# Altium PCB PCB1.PcbDoc
Units mm, origin at the board's own origin, x right, y up, seen from the top; angles counter-clockwise.
Board outline 202.97 x 55.7 mm, 4 copper layers (Top Layer, Mid-Layer 1, Mid-Layer 2, Bottom Layer), stack 0.238 mm thick; 28 components, 17 nets, 118 pads, 628 vias.
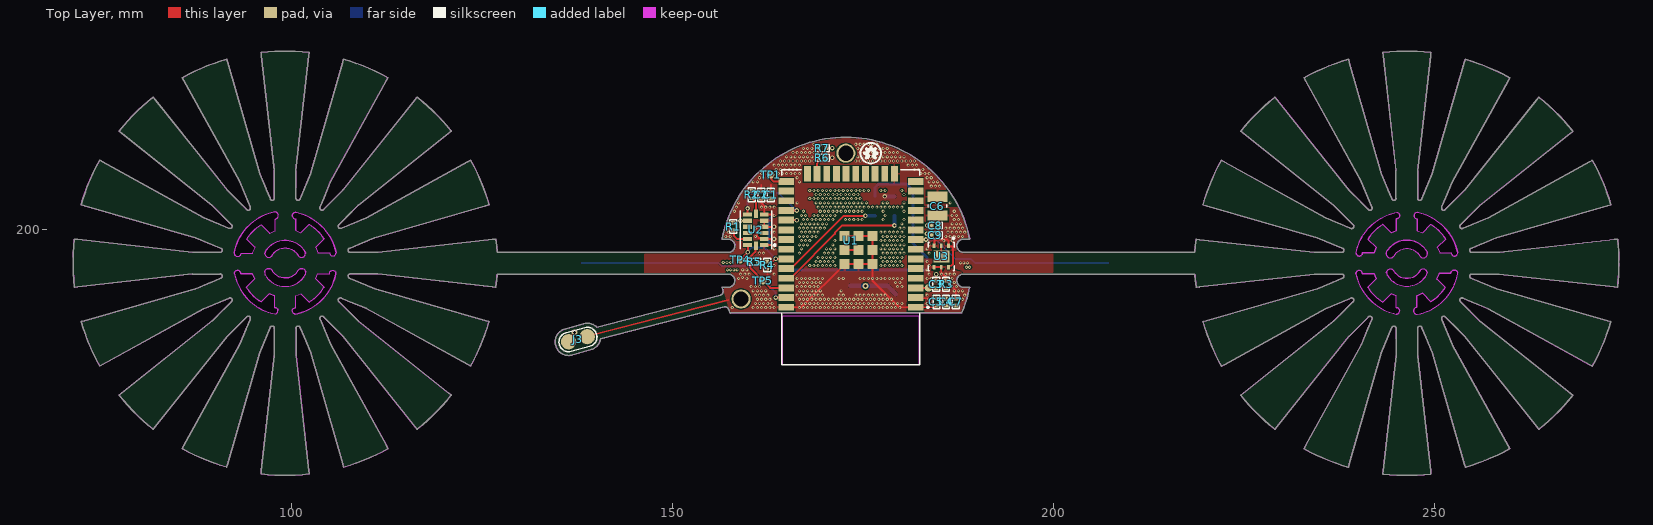
[diagram p0: Top Layer view]
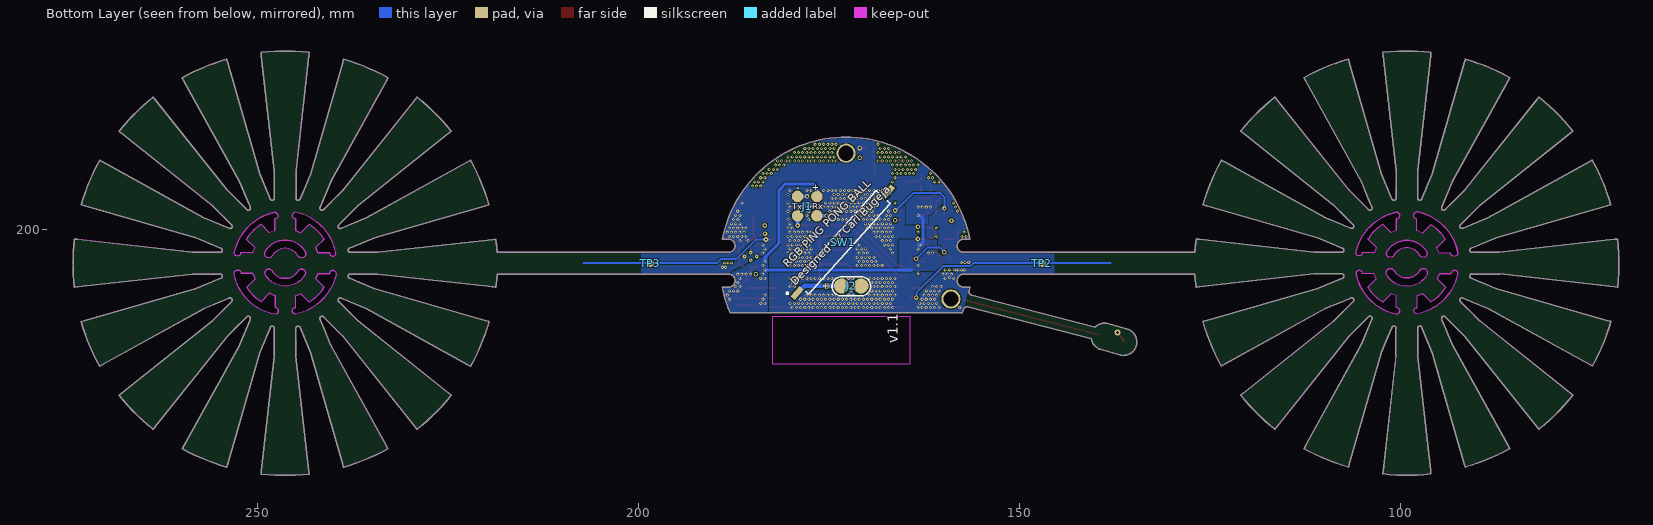
[diagram p1: Bottom Layer view, seen from below]
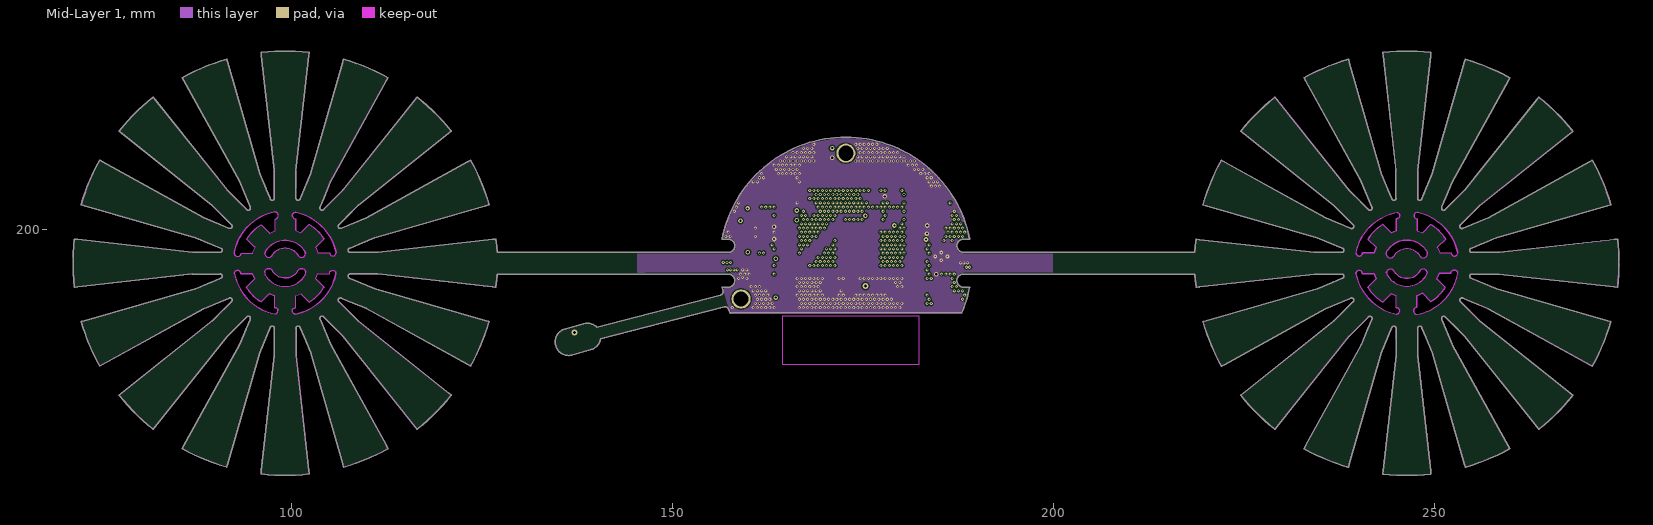
[diagram p2: Mid-Layer 1]
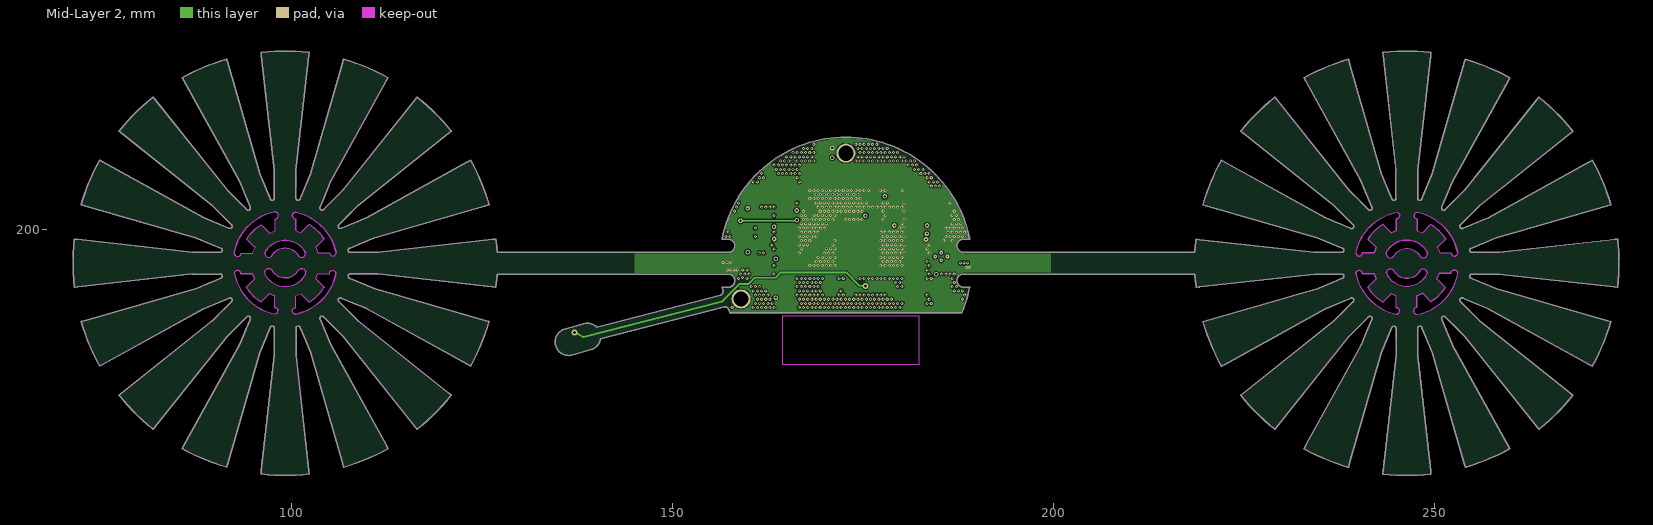
[diagram p3: Mid-Layer 2]

## Layer stack, top to bottom
Top Solder: solder mask 0.0102, Solder Resist, Dk 3.5
Top Layer: signal copper 0.0356
Dielectric 1: dielectric 0.032, FR-4, Dk 4.8
Mid-Layer 1: signal copper 0.0356
Dielectric2: dielectric 0.032, FR-4, Dk 4.8
Mid-Layer 2: signal copper 0.0356
Dielectric3: dielectric 0.032, FR-4, Dk 4.8
Bottom Layer: signal copper 0.0356
Bottom Solder: solder mask 0.0102, Solder Resist, Dk 3.5

## Board outline
838 vertices, not listed, extent 71.3,167.729 274.271,223.431
cut-out: 249.585,200.673 cw(c246.42,195.575) 251.518,198.74 251.535,198.751 250.425,197.643 250.714,196.945 252.271,196.944 252.256,196.944 ccw(c252.677,196.944) 253.098,196.929 ccw(c246.435,195.575) 247.784,202.24 ccw(c247.784,201.819) 247.769,201.398 247.792,201.398 247.79,199.869 248.488,199.58
cut-out: 253.136,194.212 ccw(c252.664,194.212) 252.194,194.255 250.714,194.256 ccw(c250.714,194.206) 250.668,194.225 250.379,193.527 ccw(c250.425,193.508) 250.375,193.508 ccw(c250.425,193.508) 250.39,193.472 251.455,192.405 cw(c246.421,195.575) 249.589,190.539 248.524,191.606 ccw(c248.488,191.571) 248.468,191.617 247.771,191.328 ccw(c247.79,191.282) 247.74,191.282 247.739,189.788 ccw(c247.789,189.318) 247.317,189.318 ccw(c247.789,189.318) 247.773,188.847 247.785,188.848 ccw(c246.42,195.561) 253.135,194.202 ccw(c253.085,194.212)
cut-out: 243.791,197.122 ccw(c244.261,196.836) 244.261,196.285 ccw(c244.261,196.836) 244.742,196.567 ccw(c244.731,196.573) 244.742,196.567 ccw(c244.991,196.419) 244.741,196.566 244.742,196.567 cw(c246.42,195.575) 248.113,196.542 ccw(c248.157,196.567) 248.118,196.535 ccw(c248.579,196.836) 248.579,196.285 ccw(c248.579,196.836) 249.046,197.127 ccw(c246.42,195.575)
cut-out: 244.683,194.583 ccw(c244.261,194.315) 243.855,194.023 243.829,194.062 ccw(c246.42,195.575) 249.006,194.054 ccw(c248.579,194.315) 248.142,194.558 248.156,194.581 cw(c246.42,195.575)
cut-out: 245.051,191.282 244.353,191.571 243.252,190.471 243.256,190.478 cw(c246.42,195.575) 241.323,192.41 241.306,192.4 242.416,193.508 242.127,194.206 240.57,194.207 240.585,194.207 ccw(c240.164,194.207) 239.743,194.221 ccw(c246.406,195.575) 245.057,188.91 ccw(c245.057,189.332) 245.072,189.753 245.049,189.753
cut-out: 245.066,202.253 cw(c245.052,201.832) 245.052,201.411 245.052,201.425 245.05,199.869 244.353,199.58 243.244,200.69 243.255,200.672 ccw(c246.42,195.575) 241.323,198.74 241.316,198.744 242.415,197.643 242.126,196.945 240.598,196.946 240.598,196.924 cw(c240.177,196.938) 239.755,196.938 cw(c246.42,195.589)
cut-out: 100.501,188.907 cw(c100.515,189.328) 100.515,189.749 100.515,189.735 100.517,191.291 101.214,191.58 102.323,190.47 102.312,190.487 ccw(c99.147,195.585) 104.244,192.42 104.251,192.416 103.152,193.517 103.441,194.215 104.969,194.214 104.969,194.236 cw(c105.39,194.222) 105.812,194.222 cw(c99.147,195.571)
cut-out: 100.516,199.878 101.214,199.589 102.315,200.689 102.311,200.682 cw(c99.147,195.585) 104.244,198.749 104.261,198.76 103.151,197.652 103.44,196.954 104.997,196.953 104.982,196.953 ccw(c105.403,196.953) 105.824,196.939 ccw(c99.161,195.585) 100.51,202.249 ccw(c100.51,201.828) 100.495,201.407 100.518,201.407
cut-out: 100.884,196.577 ccw(c101.306,196.845) 101.712,197.137 101.738,197.097 ccw(c99.147,195.585) 96.561,197.106 ccw(c96.988,196.845) 97.425,196.602 97.411,196.579 cw(c99.147,195.585)
cut-out: 101.776,194.038 ccw(c101.306,194.324) 101.306,194.875 ccw(c101.306,194.324) 100.825,194.593 ccw(c100.836,194.587) 100.825,194.592 100.825,194.593 ccw(c100.576,194.741) 100.826,194.593 100.825,194.593 cw(c99.147,195.585) 97.454,194.618 ccw(c97.41,194.592) 97.449,194.625 ccw(c96.988,194.324) 96.988,194.875 ccw(c96.988,194.324) 96.521,194.033 ccw(c99.147,195.585)
cut-out: 92.431,196.948 ccw(c92.903,196.948) 93.373,196.905 94.853,196.904 ccw(c94.853,196.954) 94.899,196.935 95.188,197.633 ccw(c95.142,197.652) 95.192,197.652 ccw(c95.142,197.652) 95.177,197.688 94.112,198.755 cw(c99.146,195.585) 95.978,200.62 97.043,199.554 ccw(c97.079,199.589) 97.099,199.543 97.796,199.832 ccw(c97.777,199.878) 97.827,199.878 97.828,201.372 ccw(c97.778,201.841) 98.25,201.841 ccw(c97.778,201.841) 97.794,202.313 97.782,202.312 ccw(c99.147,195.599) 92.432,196.958 ccw(c92.482,196.948)
cut-out: 95.982,190.487 cw(c99.147,195.585) 94.049,192.42 94.032,192.409 95.142,193.517 94.853,194.215 93.296,194.216 93.311,194.216 ccw(c92.89,194.216) 92.469,194.23 ccw(c99.132,195.585) 97.783,188.92 ccw(c97.783,189.341) 97.798,189.762 97.775,189.762 97.777,191.291 97.079,191.58
board region "Layer Stack Region 1": 572 vertices, not listed, extent 71.296,167.734 126.96,223.435
board region "Layer Stack Region 1": 187.983,194.121 187.878,194.093 187.683,193.98 187.523,193.82 187.41,193.624 187.352,193.406 187.352,193.18 187.41,192.962 187.523,192.766 187.683,192.606 187.878,192.493 188.097,192.435 188.21,192.428 188.966,192.428 188.985,192.42 188.999,192.406 189.007,192.387 189.006,192.366 188.999,192.35 188.915,191.929 188.704,191.096 188.45,190.276 188.154,189.47 187.982,189.068 187.96,189.049 187.939,189.044 157.615,189.038 157.593,189.036 157.572,189.042 157.552,189.067 157.528,189.121 157.483,189.23 157.438,189.339 157.394,189.448 157.37,189.511 157.342,189.593 157.241,189.736 157.094,189.829 156.923,189.859 156.836,189.849 140.56,185.651 140.541,185.533 140.472,185.304 140.373,185.086 140.245,184.883 140.091,184.7 139.914,184.539 139.717,184.403 139.503,184.294 139.387,184.254 136.701,183.493 136.53,183.46 136.181,183.462 135.839,183.532 135.517,183.667 135.228,183.863 134.983,184.111 134.791,184.402 134.659,184.725 134.592,185.068 134.594,185.417 134.663,185.758 134.798,186.08 134.993,186.37 135.241,186.615 135.532,186.808 135.855,186.941 136.026,186.974 138.558,187.686 138.76,187.715 139.168,187.68 139.558,187.552 139.907,187.338 140.053,187.195 156.28,191.38 156.354,191.406 156.485,191.493 156.581,191.617 156.631,191.766 156.639,191.855 156.638,191.869 156.624,191.928 156.598,192.045 156.573,192.163 156.548,192.282 156.528,192.352 156.526,192.381 156.539,192.406 156.563,192.42 156.578,192.42 157.324,192.42 157.409,192.424 157.576,192.458 157.732,192.522 157.873,192.617 157.993,192.737 158.088,192.878 158.153,193.034 158.186,193.201 158.19,193.286 158.186,193.371 158.153,193.537 158.088,193.694 157.993,193.835 157.873,193.955 157.732,194.049 157.576,194.114 157.427,194.143 157.486,197.021 157.575,197.039 157.732,197.104 157.873,197.198 157.993,197.318 158.087,197.459 158.152,197.616 158.185,197.782 158.189,197.867 158.185,197.952 158.152,198.118 158.087,198.275 157.993,198.416 157.873,198.536 157.732,198.63 157.575,198.695 157.409,198.728 157.324,198.732 156.616,198.732 156.605,198.719 156.571,198.712 156.54,198.726 156.524,198.757 156.527,198.778 156.528,198.797 156.535,198.81 156.646,199.368 156.944,200.466 157.317,201.541 157.762,202.588 158.279,203.601 158.864,204.577 159.515,205.511 160.228,206.397 161,207.233 161.828,208.013 162.707,208.735 163.634,209.394 164.605,209.989 165.613,210.515 166.656,210.971 167.727,211.355 168.822,211.663 169.936,211.896 171.063,212.052 172.198,212.13 172.767,212.13 173.335,212.13 174.47,212.052 175.597,211.897 176.71,211.664 177.804,211.355 178.875,210.972 179.917,210.517 180.926,209.991 181.896,209.397 182.822,208.737 183.702,208.016 184.53,207.236 185.302,206.402 186.015,205.516 186.666,204.583 187.251,203.608 187.768,202.595 188.214,201.548 188.587,200.474 188.886,199.377 189.003,198.809 189.006,198.794 189.006,198.78 188.999,198.761 188.984,198.747 188.956,198.74 188.209,198.74 188.096,198.732 187.878,198.674 187.682,198.561 187.522,198.401 187.409,198.205 187.351,197.987 187.351,197.761 187.409,197.543 187.522,197.347 187.682,197.188 187.878,197.075 187.987,197.045
board region "Layer Stack Region 1": 588 vertices, not listed, extent 187.983,167.725 274.271,223.426
board region "Layer Stack Region 1": 127.381,194.156 126.961,194.156 126.96,194.136 126.96,197.018 126.961,197.006 127.381,197.006
board region "Layer Stack Region 1": 127.381,197.006 146.522,197.006 146.536,197.001 157.324,197.001 157.409,197.006 157.486,197.021 157.427,194.143 157.409,194.147 157.324,194.151 146.316,194.152 146.303,194.156 127.381,194.156

## Design rules (kind name [scope] priority, off if disabled: settings)
Clearance [All] p1: gap=0.15 ignorepadtopadclearanceinfootprint=FALSE
HoleToHoleClearance [All] p1: gap=0.1 allowstackedmicrovias=TRUE
PasteMaskExpansion [All] p1: expansion=-0.05
PolygonConnect PolygonConnect_1 [IsVia] p1: connectstyle=Direct reliefconductorwidth=0.254 reliefentries=4 polygonreliefangle="90 Angle" airgapwidth=0.254
PolygonConnect [All] p2: connectstyle=Relief reliefconductorwidth=0.254 reliefentries=4 polygonreliefangle="90 Angle" airgapwidth=0.254
RoutingVias [All] p1: holewidth=0.711 width=1.27 viastyle="Through Hole" minholewidth=0.2 minwidth=0.4 maxholewidth=0.711 maxwidth=1.27
SolderMaskExpansion [All] p1: expansion=0 istentingtop=FALSE
Width [All] p1: maxlimit=1 minlimit=0.254 preferedwidth=0.254
28 further rules are at their usual default settings.

## Components (designator, comment, footprint, x,y, rotation, side; value= is the part's Value field where it differs from the comment)
C1 "100nF" RESC1005X03N 162.915,204.553 r90 top
C2 "10nF" RESC1005X03N 161.655,204.545 r90 top
C3 "1uF" RESC1005X03N 184.637,192.816 r90 top
C4 "100nF" RESC1005X03N 185.923,190.489 r270 top
C5 "10nF" RESC1005X03N 184.662,190.5 r270 top
C6 "47uF" TAYO-C1210-2_L 184.785,203.073 r270 top
C7 "4.7uF" RESC1005X03N 187.193,190.489 r270 top
C8 "100nF" RESC1005X03N 184.493,200.529 r180 top
C9 "10nF" RESC1005X03N 184.493,199.263 r180 top
J1 "H5P2.54" 4PAD 177.873,203.073 r90 bottom
J2 "H2P2.54" T2P2.54 172.085,192.592 r0 bottom
J3 "H2P2.54" T2P2.54 137.582,185.602 r195 top
R1 "5k" RESC1005X03N 157.988,200.395 r270 top
R2 "5k" RESC1005X03N 160.387,204.571 r270 top
R3 "10k" RESC1005X03N 185.923,192.816 r90 top
R4 "5k" RESC1005X03N 162.429,195.326 r90 top
R5 "5k" RESC1005X03N 160.719,195.772 r0 top
R6 "10k" RESC1005X03N 169.672,209.423 r180 top
R7 "10k" RESC1005X03N 169.672,210.693 r180 top
SW1 "MK15-B-2-OE" CAPMP16025X38N 174.012,197.459 r132 bottom
TP1 "TESTPAD" TESTPAD#1 162.875,207.199 r90 top
TP2 "TESTPAD" TESTPAD#1 147.066,195.58 r90 bottom
TP3 "TESTPAD" TESTPAD#2 198.501,195.58 r90 top
TP4 "TESTPAD" TESTPAD#1 158.88,196.051 r90 top
TP5 "TESTPAD" TESTPAD#1 161.872,193.283 r90 top
U1 "ESP32-WROOM-32" FP-ESP32-WROOM-32-MFG 173.428,195.061 r180 top
U2 "ADXL345BCCZ-RL7" FP-CC-14-1-MFG 160.954,199.962 r180 top
U3 "ESP32-WROOM-32" NGG0006A_V 185.293,196.469 r270 top

## Footprints (in the part's own frame and the unit in brackets; to place one, negate y for a bottom-side part, rotate by r counter-clockwise, add the part's x,y. Pads: shape width x height; smd on the part's side, far side on the other; paste and mask are expansions set on the pad)
4PAD [mil]
  round 60 smd: 1(-50,50) 2(-50,-50) 3(50,50) 4(50,-50)
CAPMP16025X38N [mm] "Molded Capacitor, 2-Leads, Body 16.00x2.50mm, IPC Medium Density"
  rect 1.8x0.75 smd: 1(-7.775,0) 2(10.125,0)
  silkscreen extent -8.77,-1.23 9.14,1.27, body extent -6.86,-1.23 9.14,1.27, height 3.75
FP-CC-14-1-MFG [mm]
  rect 1.145x0.55 smd paste+0 mask+0: 1(-1.098,2) 2(-1.098,1.2) 3(-1.098,0.4) 4(-1.098,-0.4) 5(-1.098,-1.2) 6(-1.098,-2) 8(1.098,-2) 9(1.098,-1.2) 10(1.098,-0.4) 11(1.098,0.4) 12(1.098,1.2) 13(1.098,2)
  rect 0.55x1.145 smd paste+0 mask+0: 7(0,-2.097) 14(0,2.097)
  silkscreen extent -2.6,-2.5 2.07,2.5, body extent -2.17,-3.17 2.17,3.17, height 0.25
FP-ESP32-WROOM-32-MFG [mm]
  rect 2x0.9 smd paste+0 mask+0: 1(-8.5,5.26) 2(-8.5,3.99) 3(-8.5,2.72) 4(-8.5,1.45) 5(-8.5,0.18) 6(-8.5,-1.09) 7(-8.5,-2.36) 8(-8.5,-3.63) 9(-8.5,-4.9) 10(-8.5,-6.17) 11(-8.5,-7.44) 12(-8.5,-8.71) 13(-8.5,-9.98) 14(-8.5,-11.25) 25(8.5,-11.25) 26(8.5,-9.98) 27(8.5,-8.71) 28(8.5,-7.44) 29(8.5,-6.17) 30(8.5,-4.9) 31(8.5,-3.63) 32(8.5,-2.36) 33(8.5,-1.09) 34(8.5,0.18) 35(8.5,1.45) 36(8.5,2.72) 37(8.5,3.99) 38(8.5,5.26)
  rect 0.9x2 smd paste+0 mask+0: 15(-5.715,-12.25) 16(-4.445,-12.25) 17(-3.175,-12.25) 18(-1.905,-12.25) 19(-0.635,-12.25) 20(0.635,-12.25) 21(1.905,-12.25) 22(3.175,-12.25) 23(4.445,-12.25) 24(5.715,-12.25)
  rect 1.33x1.33 smd paste+0 mask+0: 39(-2.835,-0.405) 39(-2.835,-4.075) 39(-2.835,-2.24) 39(-1,-0.405) 39(-1,-2.24) 39(-1,-4.075) 39(0.835,-0.405) 39(0.835,-2.24) 39(0.835,-4.075)
  Keep-Out Layer region: -9,6.45 9,6.45 9,12.75 -9,12.75
  Keep-Out Layer region: -9,6.45 9,6.45 9,12.75 -9,12.75
  silkscreen extent -10.25,-12.8 9.05,12.8, body extent -9.6,-13.35 9.6,12.9, height 0.25
NGG0006A_V [mm] "SON, 6-Leads, Body 3x3 mm, Pitch 0.95mm, Full Paste, NSC Recommended"
  rrect29% 0.6x0.35 smd paste-0.175 mask+0.051: 1(-1.4,0.95) 2(-1.4,0) 3(-1.4,-0.95) 4(1.4,-0.95) 5(1.4,0) 6(1.4,0.95)
  rrect6% 1.6x2.1 smd paste-0.8 mask+0.051: 7(0,0)
  silkscreen extent -2.52,-1.7 1.85,1.73, body extent -1.55,-1.55 1.55,1.55, height 0.8
RESC1005X03N [mm] "Chip Resistor, 2-Leads, Body 1.00x0.50mm, IPC Medium Density"
  rect 0.5x0.55 smd: 1(-0.475,0) 2(0.475,0)
  silkscreen extent -0.9,-0.45 0.9,0.45, body extent -0.5,-0.25 0.5,0.25, height 0.3
T2P2.54 [mm]
  round 2 smd: 1(-1.27,0) 2(1.27,0)
  silkscreen extent -2.54,-1.23 2.54,1.31
TAYO-C1210-2_L [mm] "Chip Capacitor, 2-Leads, Body 3.50x2.70mm, IPC High Density"
  rect 1.35x2.6 smd: 1(-1.225,0) 2(1.225,0)
  silkscreen extent -0.15,-1.2 0.15,1.2, body extent -1.75,-1.35 1.75,1.35, height 2.7
TESTPAD#1 [mm]
  round 1 smd paste-5: 1(0,0)
TESTPAD#2 [mm]
  round 1 smd far side paste-5: 1(0,0)

## Part data
C1 C2 C3 C4 C5 C7 C8 C9: library part CAP
C6: library part CMP-2000-06559-1, "High Value Multilayer Ceramic Capacitor, 47 uF, 10 V, +/- 20%, -55 to 125 degC, 2-Pin - LMK325B7476KM-PRSMD (C1210), RoHS, Tape and Reel", Capacitance=47µF, Manufacturer="Taiyo Yuden", Operating Temperature=-55°C~125°C, Package / Case=1210(3225Metric), Package Description="2-Pin Surface Mount Device, Body 3.2 x 2.5 mm, Height 2.7 mm", Package Reference=C1210, Ratings=-, Standard Package=1, Temperature Coefficient=X7R, Tolerance=±20%, Voltage - Rated=10V, Applications=GeneralPurpose, Category=Capacitors, Datasheet URL=https://datasheet.ciiva.com/142/lmk325b7476mm-tr-ss-142765.pdf, Datasheet Version=10/2014, Family=CeramicCapacitors, Features=-, Height - Seated (Max)=-, Lead Spacing=-, Lead Style=-, Manufacturer URL=http://www.t-yuden.com/, Mounting Technology=SurfaceMount, Mounting Type=SurfaceMount,MLCC, Online Catalog=MSeries, Other Names=587-2783-6, Packaging=Digi-Reel®, Series=M, Size / Dimension="0.126\"Lx0.098\"W(3.20mmx2.50mm)", Thickness (Max)="0.106\"(2.70mm)"
J1: library part H4P2.54
R1 R2 R3 R4 R5 R6 R7: library part RES
U1: library part CMP-194065-000008-1, "RX TXRX MOD WIFI SURFACE MOUNT", Case/Package=SMD/SMT, Frequency=2.5GHz, Max Operating Temperature=85°C, Min Operating Temperature=-40°C, Operating Supply Voltage=3.6V, Package Quantity=550, Data Rate=150Mbps, Mount="Surface Mount", Packaging="Cut Tape", Sensitivity=-98dBm, Weight=0.088185oz
U2: library part CMP-0885-00033-2, "ACCEL 2-16G I2C/SPI 14LGA", Case/Package=LGA, Max Operating Temperature=85°C, Max Supply Voltage=3.6V, Min Operating Temperature=-40°C, Min Supply Voltage=2V, Nominal Supply Current=140uA, Operating Supply Current=145uA, Package Quantity=1, -3db Bandwidth=1.6kHz, Axis="X, Y, Z", Bandwidth=0.05Hz, Depth=3mm, Lead Free="Contains Lead", Length=5mm, Number of Pins=14, Output Type=Digital, Packaging="Tape and Reel", Radiation Hardening=No, Sensitivity=256LSB/g
U3: library part CMP-0062-01530-4, "500mA Low Dropout CMOS Linear Regulators Stable with Ceramic Output Capacitors, 6-pin LLP, Pb-Free, 1000 Reel", Manufacturer="Texas Instruments", PackageTopMarking=ZXYTT*L130B, PartNumber=LP38693SD-3.3/NOPB, PowerWise=Y, ComponentLink1Description="Datasheet URL", ComponentLink1URL=http://www.ti.com/general/docs/lit/getliterature.tsp?genericPartNumber=LP38693&fileType=pdf, CompType="LDO IC", High-Reliability=Y, PackageDescription="LLP, Plastic, Dual, 3 x 3 x 0.8mm Body, 6 Lead, 0.95mm Pitch, No Pullback", PackageReference=NGG0006A, PinCount=6, RoHS=Y

## Free pads (board coordinates)
  round 1 smd paste-2: 4(183.623,192.341)
  round 2.5 hole 2: ""(159.004,190.881) ""(172.767,210.026)

## Via types
v1: diameter 0.4, hole 0.2, Top Layer to Bottom Layer, tented both sides, 604 vias
v2: diameter 0.6, hole 0.3, Top Layer to Bottom Layer, tented both sides, 18 vias
v3: diameter 0.5, hole 0.2, Top Layer to Bottom Layer, tented bottom, 4 vias
v4: diameter 0.8, hole 0.4, Top Layer to Bottom Layer, tented both sides, 2 vias

## Nets (pads, with @x,y where several pads share a name; then routed paths per layer and width w, separated by ;. In a path a pad name is that pad's centre, name@x,y a point inside that pad or via, vN(x,y) a via of type N, cw(c..) or ccw(c..) an arc to the next point about the centre after c; other vN are vias at no path point)
+3.3V: C1.1 C2.1 C4.1 C5.1 C7.1 J1.4 R2.1 R3.2 R4.1 R5.2 U1.2 U2.1 U2.6 U3.4 U3.5 | length 59.2
  Top Layer w0.254: R2.1 160.51,204.923 160.778,204.923 161.63,204.07 C2.1 161.655,203.497 162.052,203.1 U2.6 ; C2.1@161.68,204.07 C1.1@163.026,204.07 ; U2.1@161.929,197.84 U2.1 ; R4.1@162.429,194.876 R4.1@162.445,194.861 ; U2.1@162.429,197.962 v1@163.262,197.962 ; U2.6@162.429,201.962 v1@163.262,201.962 ; 162.445,194.123 162.46,194.108 ; U1.2 182.024,190.975 C5.1 C4.1@186.055,190.975 ; U3.4 U3.5 185.293,194.326 185.847,193.771 185.847,193.367 R3.2 185.948,193.291 187.193,192.046 C7.1 C4.1
  Bottom Layer w0.4: v1@163.262,197.962 163.224,198 162.981,198 162.685,198.296 162.685,201.385 v1@163.262,201.962 ; 164.094,194.701 183.423,194.701 v1(183.425,194.7) ; J1.4 176.603,205.53 177.067,205.994 180.721,205.994 181.61,205.105 181.61,198.179 183.425,196.365 v1(183.425,195.8)
  other v1: 183.425,190.3 183.975,190.3 183.7,190.85 188.1,190.85 183.425,191.4 188.375,191.4 187,191.95 187.55,191.95 188.1,191.95 186.725,192.5 187.275,192.5 187,193.05 183.425,193.6 183.975,193.6 186.725,193.6 163.35,194.15 183.7,194.15 185.35,194.15 185.9,194.15 186.45,194.15 187,194.15 163.35,195.25 183.7,195.25 161.425,196.9 161.975,196.9 163.35,197.45 163.075,198 163.35,201.85 161.7,202.95 162.25,202.95 162.8,202.95 163.35,202.95
GND: C1.2 C2.2 C3.2 C4.2 C5.2 C6.1 C7.2 C8.2 C9.2 J1.3 J2.1 J3.1 R1.1 R6.1 U1.1 U1.15 U1.38 U1.39 U2.2 U2.4 U2.5 U3.2 U3.7 | length 70.2
  Top Layer w0.254: J3.1@139.556,186.189 157.32,190.77 ; C2.2@161.655,204.995 C2.2 161.655,205.828 ; U2.2 161.908,198.906 161.322,198.906 161.098,199.129 161.098,199.995 161.322,200.218 161.908,200.218 U2.4 U2.5 ; U2.2@162.429,198.762 v2(163.335,198.762) ; U2.4@162.429,200.362 v2(163.335,200.362) ; C1.2 162.915,205.861 ; U1.38 166.928,189.801 172.593,195.466 174.428,195.466 U1.39@176.263,195.466 ; R6.1@170.172,209.423 v2(170.979,209.423) ; U1.39@174.428,197.301 172.593,197.301 172.593,199.136 174.428,199.136 176.263,199.136 176.263,197.301 U1.39@176.263,195.466 ; v2(183.408,199.468) 183.813,199.468 C9.2 ; v2(183.436,200.529) C8.2 ; C3.2 v2(184.637,194.123) ; v3(185.293,196.969) U3.2 ; C4.2 C7.2 ; C4.2@186.055,190.025 C5.2 184.637,190.025 184.413,189.801 U1.1 179.769,189.801 179.148,190.422 176.263,193.307 U1.39@176.263,195.466
  Bottom Layer w0.5: v2(177.873,204.343) J1.3
  other v1: 157.85,189.75 160.6,189.75 161.15,189.75 161.7,189.75 162.25,189.75 162.8,189.75 163.35,189.75 166.65,189.75 167.2,189.75 167.75,189.75 168.3,189.75 168.85,189.75 169.4,189.75 169.95,189.75 170.5,189.75 171.05,189.75 171.6,189.75 172.15,189.75 172.7,189.75 173.25,189.75 173.8,189.75 174.35,189.75 174.9,189.75 175.45,189.75 176,189.75 176.55,189.75 177.1,189.75 177.65,189.75 178.2,189.75 178.75,189.75 179.3,189.75 179.85,189.75 160.875,190.3 161.425,190.3 161.975,190.3 162.525,190.3 163.075,190.3 166.925,190.3 167.475,190.3 168.025,190.3 168.575,190.3 169.125,190.3 169.675,190.3 170.225,190.3 170.775,190.3 171.325,190.3 171.875,190.3 172.425,190.3 172.975,190.3 173.525,190.3 174.075,190.3 174.625,190.3 175.175,190.3 175.725,190.3 176.275,190.3 176.825,190.3 177.375,190.3 177.925,190.3 178.475,190.3 179.025,190.3 179.575,190.3 180.125,190.3 161.15,190.85 161.7,190.85 162.25,190.85 162.8,190.85 166.65,190.85 167.2,190.85 167.75,190.85 168.3,190.85 168.85,190.85 169.4,190.85 169.95,190.85 170.5,190.85 171.05,190.85 171.6,190.85 172.15,190.85 172.7,190.85 173.25,190.85 173.8,190.85 174.35,190.85 174.9,190.85 175.45,190.85 176,190.85 176.55,190.85 177.1,190.85 177.65,190.85 178.2,190.85 178.75,190.85 160.875,191.4 161.425,191.4 161.975,191.4 162.525,191.4 166.375,191.4 166.925,191.4 167.475,191.4 168.025,191.4 168.575,191.4 169.125,191.4 169.675,191.4 171.875,191.4 172.425,191.4 174.075,191.4 174.625,191.4 175.175,191.4 175.725,191.4 176.275,191.4 176.825,191.4 177.375,191.4 177.925,191.4 160.6,191.95 161.15,191.95 161.7,191.95 162.25,191.95 166.65,191.95 167.2,191.95 167.75,191.95 168.3,191.95 168.85,191.95 169.4,191.95 172.15,191.95 160.325,192.5 160.875,192.5 161.425,192.5 166.375,192.5 166.925,192.5 167.475,192.5 168.025,192.5 168.575,192.5 169.125,192.5 179.575,192.5 180.125,192.5 166.65,193.05 167.2,193.05 167.75,193.05 168.3,193.05 168.85,193.05 169.4,193.05 179.3,193.05 179.85,193.05 158.675,193.6 159.775,193.6 166.375,193.6 166.925,193.6 167.475,193.6 168.025,193.6 168.575,193.6 169.125,193.6 169.675,193.6 171.875,193.6 172.425,193.6 174.625,193.6 175.175,193.6 175.725,193.6 176.275,193.6 176.825,193.6 177.375,193.6 177.925,193.6 178.475,193.6 179.025,193.6 179.575,193.6 180.125,193.6 159.171,193.716 158.95,194.15 159.5,194.15 160.05,194.15 159.225,194.7 159.775,194.7 187.825,195.627 188.273,195.627 188.709,195.627 157.025,199.1 157.575,199.1 160.875,199.1 157.3,199.65 163.35,199.65 160.875,200.2 158.125,202.4 158.4,202.95 158.675,203.5 166.375,203.5 183.975,205.7 184.525,205.7 185.075,205.7 160.6,206.25 161.15,206.25 166.65,206.25 183.7,206.25 184.25,206.25 184.8,206.25 161.425,206.8 161.975,206.8 166.375,206.8 183.425,206.8 183.975,206.8 161.7,207.35 163.9,207.35 164.45,207.35 165,207.35 165.55,207.35 166.1,207.35 166.65,207.35 182.6,207.35 183.15,207.35 183.7,207.35 163.625,207.9 164.175,207.9 164.725,207.9 165.275,207.9 165.825,207.9 166.375,207.9 181.775,207.9 182.325,207.9 182.875,207.9 163.35,208.45 163.9,208.45 164.45,208.45 165,208.45 165.55,208.45 166.1,208.45 166.65,208.45 180.95,208.45 181.5,208.45 182.05,208.45 164.175,209 164.725,209 165.275,209 165.825,209 166.375,209 166.925,209 167.475,209 168.025,209 168.575,209 174.075,209 174.625,209 175.175,209 175.725,209 176.275,209 176.825,209 177.375,209 177.925,209 178.475,209 179.025,209 179.575,209 180.125,209 180.675,209 181.225,209 181.775,209 165,209.55 165.55,209.55 166.1,209.55 166.65,209.55 167.2,209.55 167.75,209.55 168.3,209.55 174.35,209.55 174.9,209.55 175.45,209.55 176,209.55 176.55,209.55 177.1,209.55 177.65,209.55 178.2,209.55 178.75,209.55 179.3,209.55 179.85,209.55 180.4,209.55 165.825,210.1 166.375,210.1 166.925,210.1 167.475,210.1 168.025,210.1 168.575,210.1 174.625,210.1 175.175,210.1 175.725,210.1 176.275,210.1 176.825,210.1 177.375,210.1 177.925,210.1 178.475,210.1 179.025,210.1 179.575,210.1 167.2,210.65 167.75,210.65 168.3,210.65 174.35,210.65 174.9,210.65 175.45,210.65 176,210.65 176.55,210.65 177.1,210.65 177.65,210.65 178.2,210.65 168.575,211.2 174.075,211.2 174.625,211.2 175.175,211.2 175.725,211.2 176.275,211.2 176.825,211.2
  other v3: 185.293,195.969 184.493,196.469 186.093,196.469
NetC3_1: C3.1 pad.4 R3.1 U1.3 | length 4
  Top Layer w0.254: U1.3 C3.1 R3.1
NetJ1_1: J1.1 U1.35 | length 18.4
  Top Layer w0.254: U1.35 165.251,193.934 165.828,193.934 171.323,199.429 171.323,199.588 172.268,200.533 v2(179.143,200.533)
  Bottom Layer w0.5: v2(179.143,200.533) J1.1
NetJ1_2: J1.2 U1.34 | length 14.5
  Top Layer w0.254: U1.34 165.251,195.204 165.885,195.204 172.484,201.803 v2(175.333,201.803)
  Bottom Layer w0.5: v2(175.333,201.803) J1.2
NetR1_2: R1.2 U2.12 | length 2.7
  Top Layer w0.254: R1.2 158.1,199.808 158.1,199.129 158.468,198.762 U2.12
NetR2_2: R2.2 U2.7 | length 2.3
  Top Layer w0.254: R2.2 160.51,203.973 160.541,203.973 160.954,203.559 U2.7
NetR4_2: R4.2 TP4.1 U1.33 U2.13 | length 9.1
  Top Layer w0.254: TP4.1 158.91,196.051 159.86,197.001 v2(159.89,197.001) 159.89,197.929 U2.13 ; R4.2 163.127,195.801 163.477,196.151 v2(163.571,196.151) U1.33@164.403,196.151
  Bottom Layer w0.254: v2(159.89,197.001) 159.89,197.095 160.222,197.427 160.222,197.452 160.402,197.632 162.09,197.632 v2(163.571,196.151)
NetR5_1: R5.1 TP5.1 U1.36 U2.14 | length 8.5
  Top Layer w0.254: U2.14 160.878,197.788 160.878,197.062 160.244,196.428 R5.1 160.244,194.911 TP5.1 162.814,192.341 U1.36@164.403,192.341
NetR6_2: R6.2 R7.2 U1.23 | length 3.5
  Top Layer w0.254: U1.23 168.983,208.692 169.074,208.783 169.074,209.3 R6.2 R7.2
NetTP1_1: TP1.1 U1.25 | length 2.7
  Top Layer w0.254: TP1.1 163,207.075 163,206.586 163.149,206.437 163.154,206.437 163.28,206.311 U1.25
NetTP2_1: TP2.1 U1.37 | length 28.5
  Top Layer w0.254: v2(163.546,191.071) U1.37@164.378,191.071
  Bottom Layer w0.254: 138.073,195.58 TP2.1 156.059,195.58 156.44,195.199 160.029,195.199 163.546,191.682 v2(163.546,191.071)
NetTP3_1: TP3.1 U1.8 | length 26.1
  Top Layer w0.254: U1.8@182.453,198.691 v2(183.285,198.691)
  Bottom Layer w0.254: v2(183.285,198.691) 184.616,198.691 187.203,196.104 189.216,196.104 189.738,195.582 189.738,195.58 TP3.1 207.264,195.58
NetU1_28: U1.28 U2.8 | length 10.8
  Top Layer w0.254: U2.8@159.857,201.937 U2.8 v2(159.857,202.77) ; U1.28@165.481,202.501 v2(166.313,202.501)
  Bottom Layer w0.254: v2(159.857,202.77) 159.857,204.27 160.382,204.795 163.926,204.795 166.22,202.501 v2(166.313,202.501)
NetU1_29: U1.29 U2.9 | length 9.2
  Top Layer w0.254: v2(158.933,201.153) U2.9@159.765,201.153 ; U1.29@165.481,201.231 v2(166.313,201.231)
  Mid-Layer 2 w0.254: v2(158.933,201.153) 166.142,201.153 166.22,201.231 v2(166.313,201.231)
  Bottom Layer w0.254: v2(158.933,201.153) v2@158.971,201.192 ; v2@166.275,201.192 v2(166.313,201.231)
Vbat: J2.2 J3.2 SW1.1 | length 50
  Top Layer w0.254: J3.2 136.356,185.618 137.16,186.422 v4(137.16,186.505) v4@137.16,186.587
  Mid-Layer 2 w0.254: v4@137.16,186.546 137.178,186.535 138.311,185.867 156.543,190.57 ; 156.541,190.577 158.791,192.827 159.978,192.827 160.823,193.673 163.547,193.673 164.246,194.372 172.804,194.372 174.554,192.622 175.305,192.622 v4(175.335,192.592)
  Bottom Layer w0.254: J2.2 J2.2@173.391,192.556 ; SW1.1@178.734,192.209 cw(c178.734,191.802) 178.956,192.144 cw(c178.734,191.802) SW1.1@179.141,191.802
  Bottom Layer w0.6: J2.2 v4(175.335,192.592) 178.252,192.592 SW1.1@179.333,191.511
Vdd: C6.2 C8.1 C9.1 R7.1 SW1.2 U3.1 U3.3 U3.6 | length 11
  Top Layer w0.254: R7.1@170.172,210.693 v2(170.979,210.693) ; U3.3 184.391,197.917 184.391,198.445 184.637,198.691 ; C6.2 184.968,201.665 C8.1 C9.1 184.968,199.238 184.637,198.907 184.637,198.691 ; U3.6@186.243,195.194 186.291,195.242 186.609,195.242 186.843,195.476 186.843,197.581 186.637,197.787 186.291,197.787 186.243,197.835 186.243,198.516 186.068,198.691 184.637,198.691
  other v1: 157.202,194.7 157.627,194.7 158.052,194.7 158.476,194.7 188.581,195.051 189.006,195.051 168.025,195.251 168.575,195.251 169.125,195.251 169.675,195.251 170.225,195.251 170.775,195.251 171.325,195.251 177.375,195.251 177.925,195.251 178.475,195.251 179.025,195.251 179.575,195.251 180.125,195.251 156.669,195.676 157.158,195.676 157.644,195.676 168.85,195.8 169.4,195.8 169.95,195.8 170.5,195.8 171.05,195.8 177.65,195.8 178.2,195.8 178.75,195.8 179.3,195.8 179.85,195.8 169.125,196.35 169.675,196.35 170.225,196.35 170.775,196.35 171.325,196.35 177.375,196.35 177.925,196.35 178.475,196.35 179.025,196.35 179.575,196.35 180.125,196.35 166.65,196.9 169.95,196.9 170.5,196.9 171.05,196.9 177.65,196.9 178.2,196.9 178.75,196.9 179.3,196.9 179.85,196.9 180.4,196.9 183.7,196.9 166.925,197.45 170.225,197.45 170.775,197.45 171.325,197.45 177.375,197.45 177.925,197.45 178.475,197.45 179.025,197.45 179.575,197.45 180.125,197.45 183.425,197.45 166.65,198 167.2,198 167.75,198 171.05,198 177.65,198 178.2,198 178.75,198 179.3,198 179.85,198 180.4,198 183.7,198 166.925,198.55 167.475,198.55 168.025,198.55 171.325,198.55 177.375,198.55 177.925,198.55 178.475,198.55 179.025,198.55 179.575,198.55 180.125,198.55 185.625,198.55 186.725,198.55 166.65,199.1 167.2,199.1 167.75,199.1 168.3,199.1 168.85,199.1 177.65,199.1 178.2,199.1 178.75,199.1 179.3,199.1 179.85,199.1 180.4,199.1 185.9,199.1 186.45,199.1 187,199.1 187.55,199.1 188.1,199.1 166.925,199.65 167.475,199.65 168.025,199.65 168.575,199.65 169.125,199.65 177.375,199.65 177.925,199.65 178.475,199.65 179.025,199.65 179.575,199.65 180.125,199.65 186.175,199.65 186.725,199.65 187.275,199.65 187.825,199.65 188.375,199.65 166.65,200.2 167.2,200.2 167.75,200.2 168.3,200.2 168.85,200.2 169.4,200.2 169.95,200.2 179.85,200.2 180.4,200.2 185.9,200.2 186.45,200.2 187,200.2 187.55,200.2 188.1,200.2 166.925,200.75 167.475,200.75 168.025,200.75 168.575,200.75 169.125,200.75 169.675,200.75 170.225,200.75 180.125,200.75 186.725,200.75 187.275,200.75 187.825,200.75 167.2,201.3 167.75,201.3 168.3,201.3 168.85,201.3 169.4,201.3 169.95,201.3 170.5,201.3 171.05,201.3 172.7,201.3 173.25,201.3 173.8,201.3 174.35,201.3 174.9,201.3 177.65,201.3 180.4,201.3 187,201.3 187.55,201.3 166.925,201.85 167.475,201.85 168.575,201.85 169.125,201.85 169.675,201.85 170.225,201.85 170.775,201.85 171.325,201.85 177.925,201.85 186.725,201.85 187.275,201.85 167.2,202.4 169.4,202.4 169.95,202.4 170.5,202.4 171.05,202.4 171.6,202.4 172.15,202.4 172.7,202.4 173.25,202.4 173.8,202.4 174.35,202.4 174.9,202.4 177.65,202.4 180.4,202.4 187,202.4 169.125,202.95 169.675,202.95 170.225,202.95 170.775,202.95 171.325,202.95 171.875,202.95 172.425,202.95 172.975,202.95 173.525,202.95 174.075,202.95 174.625,202.95 175.175,202.95 175.725,202.95 176.275,202.95 176.825,202.95 177.375,202.95 177.925,202.95 178.475,202.95 179.025,202.95 179.575,202.95 180.125,202.95 168.85,203.5 169.4,203.5 169.95,203.5 170.5,203.5 171.05,203.5 171.6,203.5 172.15,203.5 172.7,203.5 173.25,203.5 173.8,203.5 174.35,203.5 174.9,203.5 175.45,203.5 177.65,203.5 178.2,203.5 180.4,203.5 186.45,203.5 168.025,204.05 168.575,204.05 169.125,204.05 169.675,204.05 170.225,204.05 170.775,204.05 171.325,204.05 171.875,204.05 172.425,204.05 172.975,204.05 173.525,204.05 174.075,204.05 174.625,204.05 168.85,204.6 169.4,204.6 169.95,204.6 170.5,204.6 171.05,204.6 171.6,204.6 172.15,204.6 172.7,204.6 173.25,204.6 173.8,204.6 174.35,204.6 180.4,204.6 168.025,205.15 168.575,205.15 169.125,205.15 169.675,205.15 170.225,205.15 170.775,205.15 171.325,205.15 171.875,205.15 172.425,205.15 172.975,205.15 173.525,205.15 174.075,205.15 174.625,205.15 175.175,205.15 175.725,205.15 177.375,205.15 177.925,205.15 180.125,205.15
pads on no net: U1.4 U1.5 U1.6 U1.7 U1.9 U1.10 U1.11 U1.12 U1.13 U1.14 U1.16 U1.17 U1.18 U1.19 U1.20 U1.21 U1.22 U1.24 U1.26 U1.27 U1.30 U1.31 U1.32 U2.3 U2.10 U2.11

## Polygon pours and split planes (outlines as drawn)
GND on Top Layer "NONET_L-01_P-001" (solid, remove dead copper, pour order 10): 146.282,196.925 146.282,189.018 200.025,189.018 200.025,212.104 146.516,212.104 146.516,209.143
Vdd on Top Layer "NONET_L-01_P-001" (solid, remove dead copper, pour order 3): 183.028,197.229 187.559,197.229 187.559,197.398 189.006,198.845 189.006,202.923 183.028,202.923
+3.3V on Top Layer "NONET_L-01_P-001" (solid, remove dead copper, pour order 2): 183.028,196.151 184.243,196.151 187.293,194.619 188.956,194.209 188.956,189.103 180.721,189.103 180.721,196.151
+3.3V on Top Layer "NONET_L-01_P-001" (solid, remove dead copper, pour order 14): 159.937,205.471 159.937,203.671 161.646,201.962 162.052,201.962 162.052,200.762 162.139,200.675 164.928,200.675 164.928,204.795 164.704,204.571 160.837,204.571
+3.3V on Top Layer "NONET_L-01_P-001" (solid, remove dead copper, pour order 13): 162.814,192.341 164.928,192.341 164.928,198.691 160.837,198.691 160.837,197.021 160.244,196.428 160.361,196.311 160.361,194.714
Vdd on Bottom Layer "NONET_L-01_P-001" (solid, remove dead copper, pour order 12): 145.445,189.075 199.644,189.075 199.644,212.13 145.445,212.13
GND on Bottom Layer "NONET_L-01_P-001" (solid, remove dead copper, pour order 7): 183.078,194.433 183.078,189.103 157.552,189.103 157.552,189.067 155.899,194.411
+3.3V on Bottom Layer "NONET_L-01_P-001" (solid, remove dead copper, pour order 9): 162.814,192.341 165.885,192.341 165.885,198.691 160.837,198.691 160.837,197.021 160.244,196.428 160.361,196.311 160.361,194.714
+3.3V on Bottom Layer "NONET_L-01_P-001" (solid, remove dead copper, pour order 11): 159.937,205.471 159.937,203.671 161.646,201.962 162.052,201.962 162.052,200.762 162.139,200.675 164.928,200.675 164.928,204.795 164.704,204.571 160.837,204.571
+3.3V on Bottom Layer "NONET_L-01_P-001" (solid, pour order 1): 183.028,196.761 187.293,194.619 187.939,194.295 187.488,192.816 188.953,192.377 188.956,189.103 183.028,189.103
GND on Mid-Layer 1 "NONET_L-01_P-001" (solid, remove dead copper, pour order 0): 145.254,189.044 199.935,189.044 199.935,212.13 145.695,212.13
Vdd on Mid-Layer 2 "NONET_L-01_P-001" (solid, remove dead copper, pour order 15): 145.034,189.022 199.644,189.022 199.644,212.078 145.034,212.078

## Keep-outs
Keep-Out Layer:
  drawing of 2080 lines, arcs and shapes, not listed

## Other copper
Multi-Layer:
  pour cut-out: 156.578,192.42 157.552,189.067 140.014,185.263 139.552,187.131

## Silkscreen, mask and mechanical layers (free items; w line width, h text height)
Top Overlay:
  drawing of 2 lines, arcs and shapes, not listed
Bottom Overlay:
  text "+" at 176.299,205.122 h0.8
  text "-" at 178.839,205.109 h0.8
  text "Rx" at 177.21,202.642 h0.8
  text "Tx" at 179.809,202.628 h0.8
  text "RGB PING PONG BALL" at 180.145,194.68 h1.8 r315
  text "Designed by Carl Bugeja" at 179.175,192.268 h1.8 r315
  text "+" at 174.956,192.192 h0.8
  text "v1.1" at 165.968,185.088 h1.3 r270
Mechanical 1:
  drawing of 469 lines, arcs and shapes, not listed
Mechanical 2:
  circle w0.254: c172.767,210.026 r1
  circle w0.254: c159.004,190.881 r1
  lines w0.1: 156.578,192.37 157.324,192.37 ccw(c157.324,193.286) 158.24,193.286 158.24,197.866 ; 156.577,198.765 cw(c172.767,195.58) 172.767,212.08 cw(c172.767,195.58) 188.951,198.79 ; 156.577,198.783 157.324,198.783 cw(c157.324,197.867) 158.24,197.867 ; 156.582,192.37 ccw(c172.767,195.58) 157.598,189.087 ; 157.615,189.095 187.939,189.095 ccw(c172.767,195.58) 188.953,192.377 ; 187.294,193.293 ccw(c188.21,193.293) 188.21,192.377 188.956,192.377 ; 187.293,193.294 187.293,197.874 cw(c188.209,197.874) 188.209,198.79 188.956,198.79 ; 166.22,190.754 180.213,190.754 180.213,205.994 166.22,205.994 166.22,190.754
  text "Bottom Stiffener" at 181.864,210.566 h1.52
  text "No Stiffener Area" at 167.005,201.93 h0.8
Mechanical 11:
  lines w0.1: 136.691,183.542 cw(c136.366,185.234) 136.037,186.925 138.55,187.74 cw(c138.809,185.931) 140.154,187.169 147.123,189.018 ; 136.691,183.545 ccw(c133.229,203.75) 139.408,184.204 ccw(c138.809,185.931) 140.624,185.712 147.447,187.452
  lines w0.254: 147.123,189.018 147.447,187.452
  text "BOTTOM 3M TAPE" at 140.27,181.363 h1.52

## Panel: embedded boards
"..\..\LEDs_PCB\RGB_Ball\PCB1.PcbDoc" at 71.295,167.738, 1 rows x 1 columns, spacing 63.5 x 38.1, rotation 0
"..\..\LEDs_PCB\RGB_Ball\PCB1.PcbDoc" at 274.272,223.422, 1 rows x 1 columns, spacing 63.5 x 38.1, rotation 180